# EAGLE board Power Supply (EAGLE 5.11)
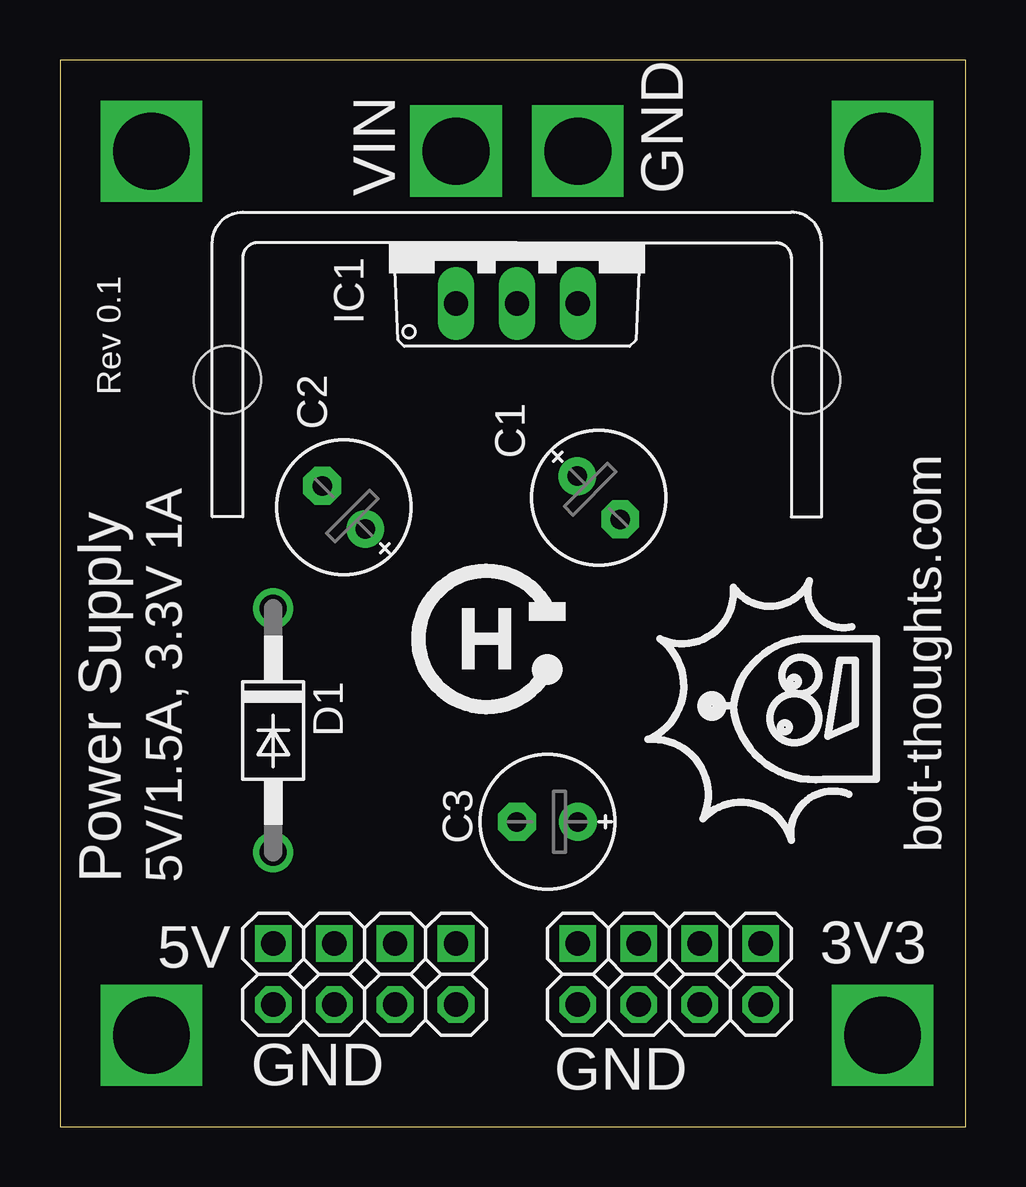
[diagram p0: board, top side]
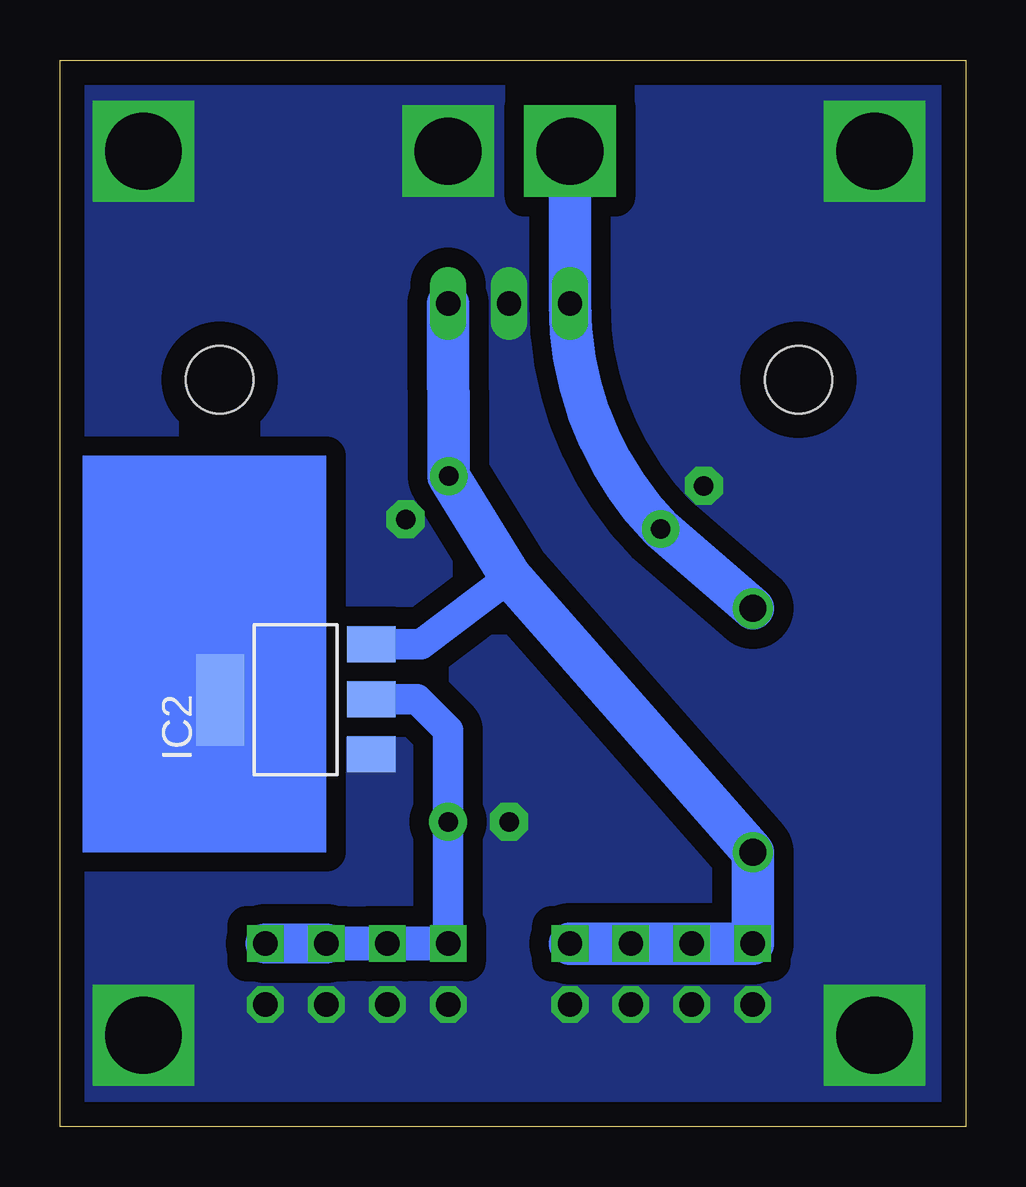
[diagram p1: board, bottom side, seen from below]

Size 37.77 x 44.44 mm. Coordinates in mm from the lower left corner, seen from the top.
Outline: 0,0 37.77,0 37.77,44.44 0,44.44 0,0
Copper layers (1*16): Top 0.035mm / dielectric 1.5mm / Bottom 0.035mm
Design rules "default": minimum track width 10mil, minimum drill 24mil, track to track 8mil, track to pad 8mil, pad to pad 8mil, via to via 8mil, smd to smd 8mil, copper to edge 40mil, drill to drill 8mil, minimum pad ring 10mil, minimum via ring 8mil, stop-mask expansion 4mil, vias tented up to drill 0mil, thermal gap 10mil

## Footprints (pad centres in the part's own frame; a part is rotated, then mirrored left to right if it is on the bottom)
E2,5-6E = drill 0.813 pad 1.575 round: + -1.27,0 | drill 0.813 pad 1.575 octagon: - 1.27,0
DO41-10 = drill 1.118 round: A 5.08,0; C -5.08,0
TO220V = drill 1.016 long: 1 -2.54,-2.54; 2 0,-2.54; 3 2.54,-2.54
SOT223 = smd 1.499 x 2.007: 1 -2.261,-3.15; 2 0.025,-3.15; 3 2.311,-3.15 | smd 3.81 x 2.007: 4 0,3.15
1X02-S = drill 1.016 square: 1 -1.27,0 | drill 1.016 octagon: 2 1.27,0
AAVID.523002B00000G = hole 2.8: -12.065,5.715; 12.065,5.715

## Placement (x,y rotation side)
C1  0.1uF  [E2,5-6E]  22.46,26.2 315 top
C2  0.33uF  [E2,5-6E]  11.83,25.8 135 top
C3  0.1uF  [E2,5-6E]  20.32,12.7 180 top
D1  1N4004  [DO41-10]  8.89,16.51 270 top
IC1  7805TV  [TO220V]  19.05,36.83 0 top
IC2  REG1117  [SOT223]  27.94,17.78 90 bottom
JP1  [1X02-S]  8.89,6.35 270 top
JP2  [1X02-S]  11.43,6.35 270 top
JP3  [1X02-S]  13.97,6.35 270 top
JP4  [1X02-S]  16.51,6.35 270 top
JP5  [1X02-S]  29.21,6.35 270 top
JP6  [1X02-S]  21.59,6.35 270 top
JP7  [1X02-S]  24.13,6.35 270 top
JP8  [1X02-S]  26.67,6.35 270 top
M1  [AAVID.523002B00000G]  19.05,36.83 180 top
U$2  OSHW  [OSH1]  17.78,20.32 0 top
U$3  BOT-THOUGHTS  [BOT-THOUGHTS]  31.75,17.78 90 top

## Library data of the parts
C1-C3 = rcl
D1 = diode
IC1 = linear
IC2 = burr-brown; MPN: REG1117; OC_FARNELL: 1097566; OC_NEWARK: 14P6981
JP1-JP8 = pinhead-2
M1 U$2 U$3 = mes

## Nets
+3.3V: C3.+ IC2.2 JP5.1 JP6.1 JP7.1 JP8.1
+5V: C1.+ D1.A IC1.3 IC2.3 JP1.1 JP2.1 JP3.1 JP4.1
GND: C1.- C2.- C3.- IC1.2 IC2.1 JP1.2 JP2.2 JP3.2 JP4.2 JP5.2 JP6.2 JP7.2 JP8.2
VIN: C2.+ D1.C IC1.1

## Tracks (layer width: path | path; a pad name or v marks a point on that pad's centre or on a via)
+3.3V
  Bottom 1.27: IC2.2 22.89,17.8 21.59,16.51 C3.+ JP6.1
  Bottom 1.422: JP6.1 JP7.1 JP8.1
  Bottom 1.676: JP8.1 JP5.1
+5V
  Bottom 1.27: IC2.3 22.71,20.09 18.99,22.91
  Bottom 1.778: IC1.3 C1.+ 18.99,22.91 D1.A JP1.1 JP2.1 JP3.1 JP4.1
GND  (via drill 2.8, 3.2)
  other vias: 21.59,40.64 3.81,3.81 34.29,3.81 3.81,40.64 34.29,40.64
  pour Bottom (isolate 0.813, no thermals): 0,44.45 38.1,44.45 38.1,0 0,0
VIN  (via drill 2.8)
  Bottom 1.778: v16.51,40.64 IC1.1 arc-44 C2.+ D1.C
(copper drawn outside any net)
  shapes: Bottom area x1

## Text on the board
tNames: VIN | GND | Rev 0.1 | bot-thoughts.com | Power Supply | 5V/1.5A, 3.3V 1A | 5V | 3V3 | GND | GND